# EAGLE board RELAY CONTACT BOUNCE ELIMINATOR_REV 2 (EAGLE 9.6.2)
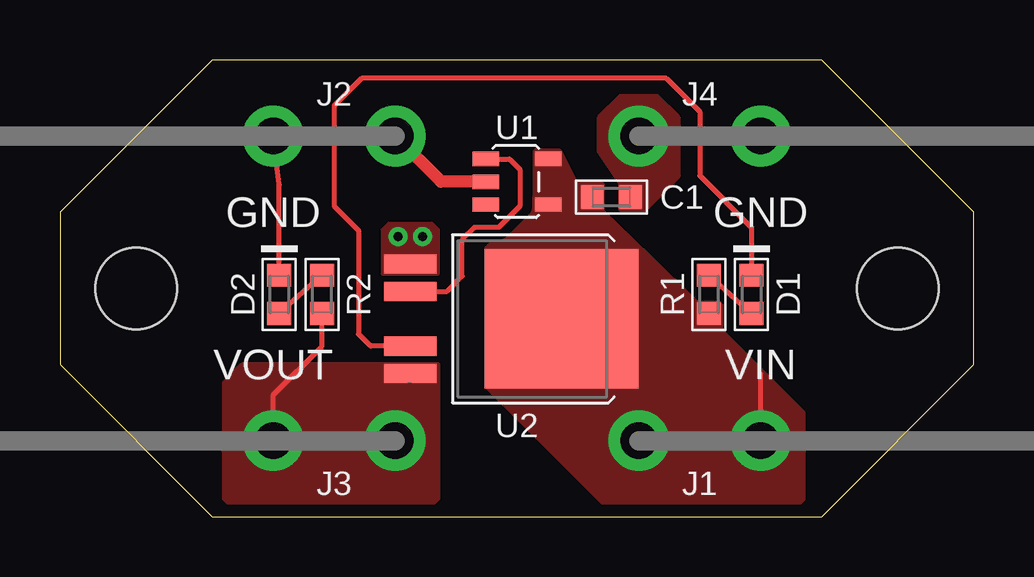
[diagram p0: board, top side]
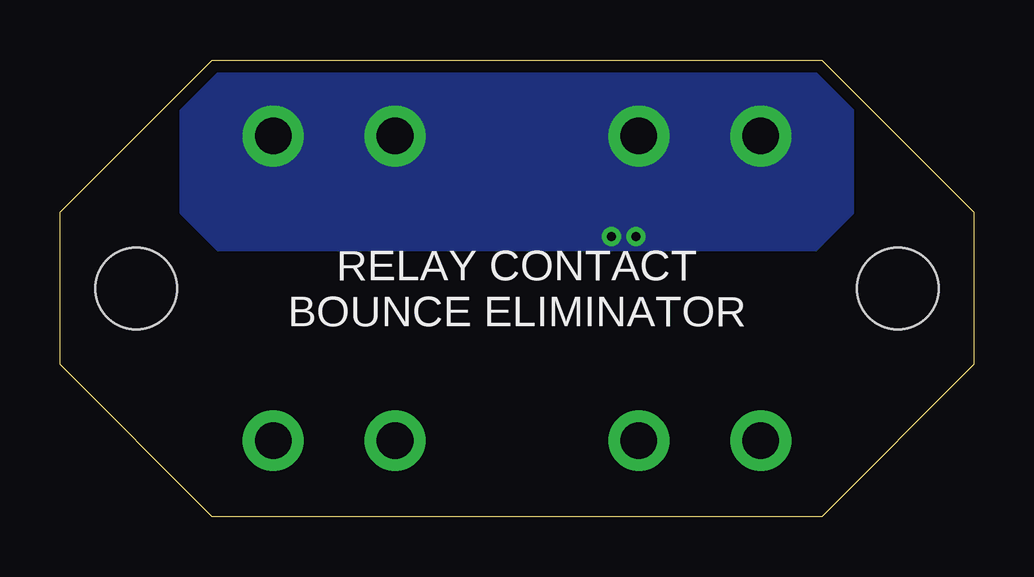
[diagram p1: board, bottom side, seen from below]

Size 38.1 x 19.05 mm. Coordinates in mm from the lower left corner, seen from the top.
Outline: 6.35,0 31.75,0 38.1,6.35 38.1,12.7 31.75,19.05 6.35,19.05 0,12.7 0,6.35 6.35,0
Copper layers (1*16): Top 0.035mm / dielectric 1.5mm / Bottom 0.035mm
Design rules "default *": minimum track width 8mil, minimum drill 0.35mm, track to track 8mil, track to pad 8mil, pad to pad 8mil, via to via 8mil, smd to smd 8mil, copper to edge 20mil, drill to drill 6mil, minimum pad ring 10mil, minimum via ring 8mil, stop-mask expansion 4mil, vias tented up to drill 0mil, thermal gap 10mil
Holes 3.4 mm at 3.17,9.53 34.92,9.53
tKeepout: area -0.3,6 to 6.7,13; area 31.4,6 to 38.4,13

## Footprints (pad centres in the part's own frame; a part is rotated, then mirrored left to right if it is on the bottom)
EIA0603 = smd 0.95 x 1: P$1 -0.8,0; P$2 0.8,0
EIA0603_LED = smd 0.95 x 1: A -0.8,0; C 0.8,0
FASTON_MALE_SERIES_250_THRU_R/A = drill 1.524 pad 2.54: 1 -2.54,0; 2 2.54,0
SOT23-5 = smd 1.1 x 0.6: 1 -1.3,0.95; 2 -1.3,0; 3 -1.3,-0.95; 4 1.3,-0.95; 5 1.3,0.95
PG-TO252-5-11 = smd 0.8 x 2.2: 1 -2.28,0; 2 -1.14,0; 4 1.14,0; 5 2.28,0 | smd 5.8 x 6.4: TAB 0,6.3

## Placement (x,y rotation side)
C1  0.1u  [EIA0603]  22.99,13.34 180 top
D1  DNS  [EIA0603_LED]  28.83,9.27 90 top
D2  GREEN  [EIA0603_LED]  9.14,9.27 90 top
J1  928814-1  [FASTON_MALE_SERIES_250_THRU_R/A]  26.67,3.17 0 top
J2  928814-1  [FASTON_MALE_SERIES_250_THRU_R/A]  11.43,15.88 180 top
J3  928814-1  [FASTON_MALE_SERIES_250_THRU_R/A]  11.43,3.17 180 top
J4  928814-1  [FASTON_MALE_SERIES_250_THRU_R/A]  26.67,15.88 0 top
R1  DNS  [EIA0603]  27.05,9.27 270 top
R2  4.99k  [EIA0603]  10.92,9.27 270 top
U1  TPS3847108  [SOT23-5]  19.05,13.97 0 top
U2  ITS428L2  [PG-TO252-5-11]  14.61,8.26 270 top

## Library data of the parts
C1 = USER_SMT_CHIP_STANDARD; MPN: CL10B104KB8NNNC; PACKAGE: 0603
D1 = USER_SMT_CHIP_STANDARD; MPN: DNS
D2 = USER_SMT_CHIP_STANDARD; MPN: LG Q396-PS-35
J1-J4 = USER_CON_HIGH_CURRENT; MPN: 928814-1
R1 = USER_SMT_CHIP_STANDARD; MPN: DNS; PACKAGE: 0603
R2 = USER_SMT_CHIP_STANDARD; MPN: ERJ-3EKF4991V; PACKAGE: 0603
U1 = USER_PMIC; MPN: TPS3847108DBVR
U2 = USER_SMART_SWITCHES; MPN: ITS428L2ATMA1

## Nets
GND: C1.P$1 D2.C J2.1 J2.2 J4.1 J4.2 U1.2 U2.1
N$1: D2.A R2.P$1
N$2: D1.A R1.P$1
N$3: U1.1 U2.2
N$4: D1.C U2.4
VIN: C1.P$2 J1.1 J1.2 R1.P$2 U1.4 U1.5 U2.TAB
VOUT: J3.1 J3.2 R2.P$2 U2.5

## Tracks (layer width: path | path; a pad name or v marks a point on that pad's centre or on a via)
GND  (via drill 0.38)
  Top 0.203: D2.C 9.14,13.84 J2.2
  Top 0.508: U1.2 15.88,13.97 J2.1
  other vias: 14.1,11.68 15.11,11.68
  pour Bottom (isolate 0.203, no thermals): 6.6,11.18 5.08,12.7 5.08,17.78 6.35,19.05 31.75,19.05 33.02,17.78 33.02,12.7 31.5,11.18
  pour Top (isolate 0.203, rank 2, no thermals): 22.48,16.64 22.48,15.24 23.37,13.91 23.37,12.83 24.38,12.83 25.78,14.22 25.78,16.64 24.89,17.53 23.37,17.53
  pour Top (isolate 0.203, no thermals): 13.46,11.94 13.46,10.16 15.75,10.16 15.75,11.94 15.49,12.19 13.72,12.19
N$1
  Top 0.203: R2.P$1 D2.A
N$2
  Top 0.203: R1.P$1 D1.A
N$3
  Top 0.203: U1.1 18.73,14.92 19.18,14.48 19.18,12.95 18.29,12.06 17.27,12.06 16.76,11.56 16.76,10.03 16.13,9.39 U2.2
N$4
  Top 0.203: U2.4 12.95,7.12 12.45,7.62 12.45,11.94 11.43,12.95 11.43,17.14 12.57,18.29 25.27,18.29 26.67,16.89 26.67,14.22 28.83,12.06 D1.C
VIN
  Top 0.203: J1.2 29.21,5.97
  pour Top (isolate 0.406, no thermals): 17.78,11.18 17.78,5.46 23.24,0 30.23,0 30.99,0.76 30.99,4.32 27.56,7.75 27.56,8.89 26.54,8.89 22.61,12.7 22.61,13.84 21.53,13.84 20.83,15.24 19.81,15.24 19.81,13.34
VOUT
  Top 0.203: J3.2 8.89,5.08 10.92,7.11 R2.P$2
  pour Top (no thermals): 7.62,0 6.86,0.76 6.86,5.59 7.62,6.35 15.75,6.35 15.75,0.76 14.99,0

## Text on the board
tPlace: GND | GND | VOUT | VIN
bPlace: RELAY CONTACT / BOUNCE ELIMINATOR